# Altium PCB PCB4.PcbDoc
Units mm, origin at the board's own origin, x right, y up, seen from the top; angles counter-clockwise.
Board outline 55.24 x 17.53 mm, 2 copper layers (Top Layer, Bottom Layer); 36 components, 31 nets, 162 pads, 27 vias.
Unrouted connection lines stored in the file: 1.
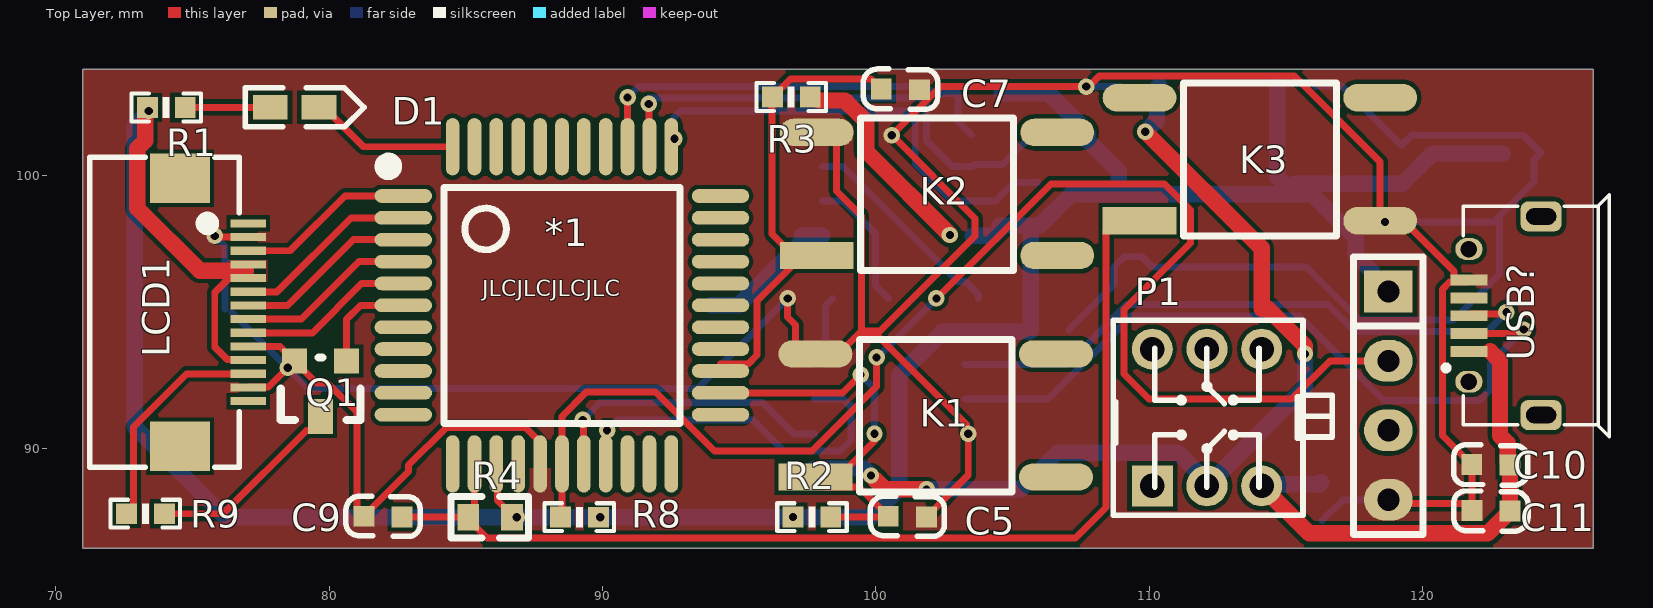
[diagram p0: Top Layer view]
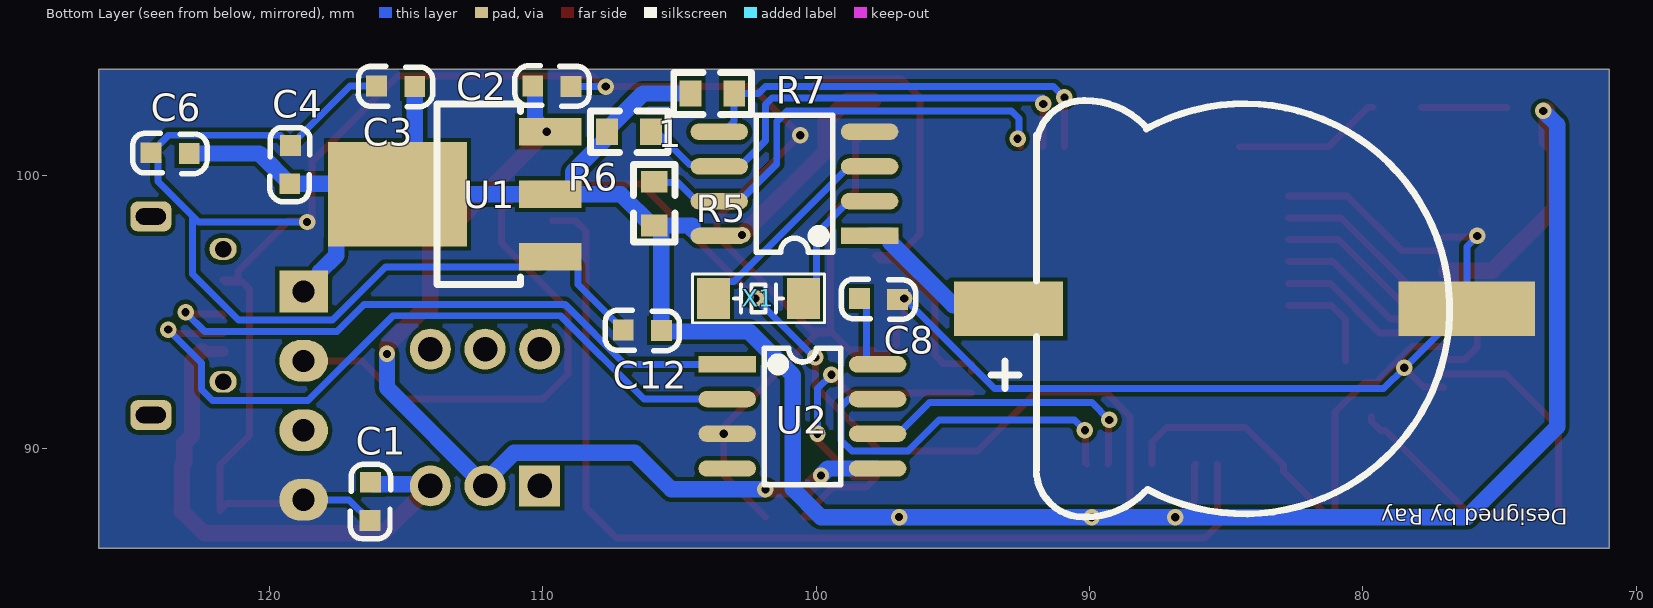
[diagram p1: Bottom Layer view, seen from below]
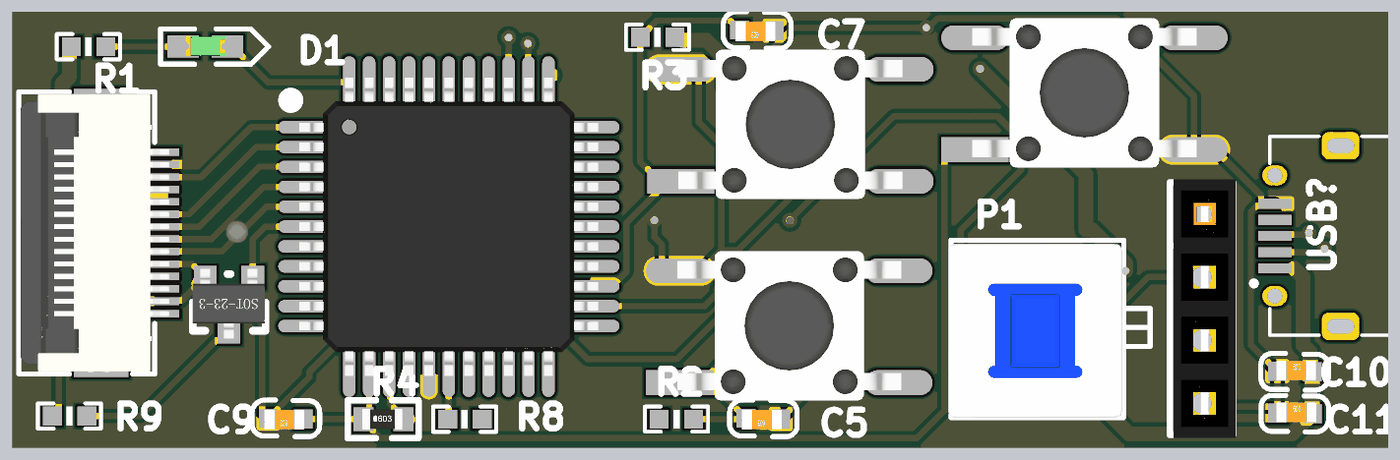
[diagram p2: 3D render of the assembled board from above, using the file's embedded part models]
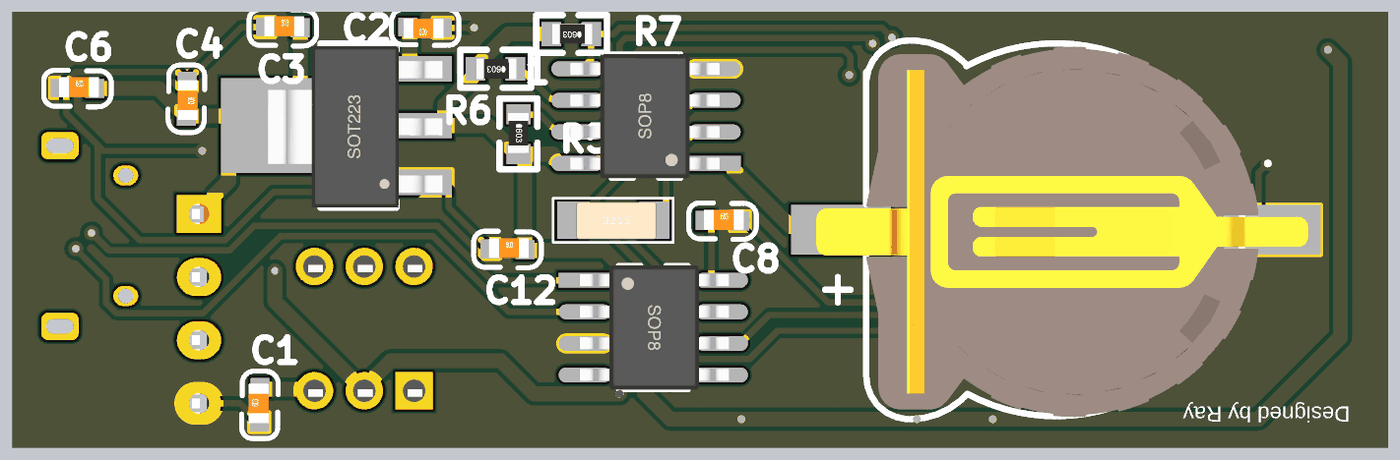
[diagram p3: 3D render of the assembled board from below, using the file's embedded part models]

## Layer stack, top to bottom
Top Solder: solder mask 0.0102, Solder Resist, Dk 3.5
Top Layer: signal copper 0.0356
Dielectric 1: dielectric 0.32, FR-4, Dk 4.8
Bottom Layer: signal copper 0.0356
Bottom Solder: solder mask 0.0102, Solder Resist, Dk 3.5

## Board outline
70.993,86.36 70.993,103.886 126.238,103.886 126.238,86.36

## Design rules (kind name [scope] priority, off if disabled: settings)
Clearance [All] p1: gap=0.16 ignorepadtopadclearanceinfootprint=FALSE
PlaneConnect [All] p1: planeconnectstyle=Direct reliefexpansion=0.508 reliefentries=4 reliefconductorwidth=0.254 reliefairgap=0.254
PolygonConnect [All] p1: connectstyle=Direct reliefconductorwidth=0.254 reliefentries=4 polygonreliefangle="90 Angle" airgapwidth=0.254
RoutingVias [All] p1: holewidth=0.711 width=1.27 viastyle="Through Hole" minholewidth=0.711 minwidth=1.27 maxholewidth=0.711 maxwidth=1.27
SolderMaskExpansion [All] p1: expansion=0.102
Width [All] p1: maxlimit=0.6 minlimit=0.254 preferedwidth=0.254
29 further rules are at their usual default settings.

## Classes and differential pairs
component class Sheet1: 1 *1 C1 C2 C3 C4 C5 C6 C7 C8 C9 C10 C11 C12 D1 K2 K3 P1 Q1 R1 R2 R3 R4 R5 R6 R7 R8 R9 U1 USB? X1

## Components (designator, comment, footprint, x,y, rotation, side; value= is the part's Value field where it differs from the comment)
1 "DS1302ZN" SOP8 98.044,97.79 r0 bottom
*1 "STC8F2K60S4" LQFP44 88.646,95.25 r0 top
C1 "10uF" 0603C 116.332,87.376 r90 bottom
C2 "10uF" 0603C 108.961,103.242 r0 bottom
C3 "10uF" 0603C 116.083,103.285 r180 bottom
C4 "10uF" 0603C 119.219,101.097 r270 bottom
C5 "0.1uF" 0603C 101.854,87.503 r180 top
C6 "0.1uF" 0603C 124.333,100.838 r180 bottom
C7 "0.1uF" 0603C 101.6,103.124 r180 top
C8 "0.1uF" 0603C 98.425,95.504 r180 bottom
C9 "0.1uF" 0603C 82.677,87.503 r180 top
C10 "0.1uF" 0603C 121.788,89.442 r0 top
C11 "0.1uF" 0603C 121.793,87.757 r0 top
C12 "0.1uF" 0603C 107.061,94.361 r180 bottom
D1 "LED" LED-0603B 77.851,102.489 r0 top
K1 "KEY_M" SMD-6X6X5 97.872,89.052 r90 top
K2 "KEY_M" SMD-6X6X5 97.917,97.155 r90 top
K3 "KEY" SMD-6X6X5 109.728,98.425 r90 top
LCD1 "1.8寸SPI屏" FPC0.5-14P 74.549,94.996 r270 top
P1 "Header 3X2" "KFT DIP-7X7" 110.109,88.646 r90 top
Q1 "NPN" SOT-23 79.756,92.329 r180 top
R1 "1K" 0603P 74.041,102.489 r0 top
R2 "10K" 0603P 97.663,87.503 r180 top
R3 "10K" 0603P 96.901,102.87 r0 top
R4 "10K" 0603R 85.09,87.503 r0 top
R5 "10K" 0603R 105.918,99.771 r270 bottom
R6 "10K" 0603R 106.045,101.6 r0 bottom
R7 "10K" 0603R 102.997,102.997 r0 bottom
R8 "10K" 0603P 89.154,87.503 r0 top
R9 "10R" 0603P 73.279,87.63 r0 top
U1 "AMS1117" SOT223 109.728,99.314 r90 bottom
U2 "CH330N" sop8 103.251,93.091 r180 bottom
U3 "DHT11" Fe-HDR1X4/2.54-S 118.745,95.758 r0 top
USB? "USB-AB" USB_AB 124.333,94.869 r270 top
X1 "XTAL-2P" "OSC 3215-2P" 102.108,95.504 r180 bottom
? "Comment" CR1220-A1 92.964,95.123 r0 bottom

## Footprints (in the part's own frame and the unit in brackets; to place one, negate y for a bottom-side part, rotate by r counter-clockwise, add the part's x,y. Pads: shape width x height; smd on the part's side, far side on the other; paste and mask are expansions set on the pad)
0603C [mil]
  rect 30x30 smd: 1(0.21,-0.35) 2(55.21,-1.35)
  silkscreen extent -26,-30 81,28, body extent -1,-15 62,16, height 12
0603P [mil]
  rect 30x30 smd: 1(-27,0) 2(27.5,-0.06)
  silkscreen extent -50,-20 50,20
0603R [mm]
  rect 0.8x0.965 smd: 1(0,0) 2(1.6,0)
  silkscreen extent -0.64,-0.76 2.21,0.76, body extent -0.04,-0.41 1.56,0.41, height 0.45
CR1220-A1 [mm]
  rect 4x2 smd: 1(0,0)
  rect 5x2 smd: 2(-16.764,0)
  silkscreen extent -16.13,-7.62 0.64,7.62, body extent -18.77,-7.37 0.99,7.53, height 4.05
Fe-HDR1X4/2.54-S [mil]
  rect 70x60 hole 32: 1(0,0)
  oval 70x60 hole 32: 2(0,-100) 3(0,-200) 4(0,-300)
  silkscreen extent -50,-350 50,50, body extent -44,-355 54,55, height 335
FPC0.5-14P [mm]
  rect 1.8x2.2 smd: 0(-4.9,0) 0(4.9,0)
  rect 0.3x1.3 smd: 1(-3.25,2.497) 2(-2.75,2.497) 3(-2.25,2.497) 4(-1.75,2.497) 5(-1.25,2.497) 6(-0.75,2.497) 7(-0.25,2.497) 8(0.25,2.497) 9(0.75,2.497) 10(1.25,2.497) 11(1.75,2.497) 12(2.25,2.497) 13(2.75,2.497) 14(3.25,2.497)
  silkscreen extent -5.68,-3.3 5.68,2.16, body extent -5.6,-3.23 5.6,2.77, height 2
"KFT DIP-7X7" [mm]
  rect 1.5x1.5 hole 0.9: 1(0,0)
  round 1.5 hole 0.9: 2(0,-2) 3(0,-4) 4(5,-4) 5(5,-2) 6(5,0)
  silkscreen extent -1.08,-6.58 6.06,1.42, body extent -1.09,-5.46 5.91,1.54, height 11.2
LED-0603B [mil]
  rect 50x35 smd: A(0,0.26) K(70,0.26)
  silkscreen extent -36,-28 135,28, body extent 4,-15 66,17, height 24
LQFP44 [mm]
  oval 2.1x0.5 smd: 1(-5.927,4) 2(-5.927,3.2) 3(-5.927,2.4) 4(-5.927,1.6) 5(-5.927,0.8) 6(-5.927,0) 7(-5.927,-0.8) 8(-5.927,-1.6) 9(-5.927,-2.4) 10(-5.927,-3.2) 11(-5.927,-4) 23(5.673,-4) 24(5.673,-3.2) 25(5.673,-2.4) 26(5.673,-1.6) 27(5.673,-0.8) 28(5.673,0) 29(5.673,0.8) 30(5.673,1.6) 31(5.673,2.4) 32(5.673,3.2) 33(5.673,4)
  oval 0.5x2.1 smd: 12(-4.127,-5.8) 13(-3.327,-5.8) 14(-2.527,-5.8) 15(-1.727,-5.8) 16(-0.927,-5.8) 17(-0.127,-5.8) 18(0.673,-5.8) 19(1.473,-5.8) 20(2.273,-5.8) 21(3.073,-5.8) 22(3.873,-5.8) 34(3.873,5.8) 35(3.073,5.8) 36(2.273,5.8) 37(1.473,5.8) 38(0.673,5.8) 39(-0.127,5.8) 40(-0.927,5.8) 41(-1.727,5.8) 42(-2.527,5.8) 43(-3.327,5.8) 44(-4.127,5.8)
  silkscreen extent -6.73,-4.32 4.19,5.33, body extent -6.13,-6 5.87,6, height 1.5
"OSC 3215-2P" [mm]
  rect 1.2x1.5 smd: 1(-1.65,0) 2(1.65,0)
  silkscreen extent -2.41,-0.89 2.41,0.89, body extent -1.47,-0.76 1.73,0.74, height 0.61
SMD-6X6X5 [mm]
  rect 1x2.7 smd: 1(-0.08,0.082)
  oval 1x2.7 smd: 2(4.42,0.082) 3(-0.08,-8.718) 4(4.42,-8.718)
  silkscreen extent -0.63,-7.11 4.95,-1.52, body extent -0.79,-8.82 5.21,0.18, height 4.95
SOP8 [mm]
  rect 2.1x0.6 smd: 1(0,0)
  oval 2.1x0.6 smd: 2(0,-1.27) 3(0,-2.54) 4(0,-3.81) 5(5.5,-3.81) 6(5.5,-2.54) 7(5.5,-1.27) 8(5.5,0)
  silkscreen extent 1.35,-4.41 4.15,0.6, body extent -0.21,-4.4 5.8,0.6, height 1.9
sop8 [mm]
  rect 2.1x0.6 smd: 1(0,0)
  oval 2.1x0.6 smd: 2(0,-1.27) 3(0,-2.54) 4(0,-3.81) 5(5.5,-3.81) 6(5.5,-2.54) 7(5.5,-1.27) 8(5.5,0)
  silkscreen extent 1.35,-4.41 4.15,0.6, body extent -0.21,-4.4 5.8,0.6, height 1.9
SOT223 [mil]
  rect 40x90 smd: 1(-90,0) 2(0,0) 3(90,0)
  rect 150x200 smd: 2(0,220)
  silkscreen extent -130,43 130,163, body extent -130,-30 126,246, height 65
SOT-23 [mil]
  rect 36x36 smd: B(-35,-35) E(40,-35)
  rect 36x50 smd: C(3,45)
  silkscreen extent -55,-40 60,50, body extent -54,-48 60,62, height 47
USB_AB [mm]
  rect 0.4x1.35 smd: 1(1.3,-2.642) 2(0.65,-2.642) 3(0,-2.642) 4(-0.65,-2.642) 5(-1.3,-2.642)
  oval 0.8x1 hole 0.6: 6(-2.438,-2.642) 9(2.413,-2.642)
  rrect50% 1.1x1.5 hole 0.6 slot 1.1 at 90 deg: 7(-3.632,0) 8(3.632,0)
  silkscreen extent -4.42,-3.58 4.42,2.49

## Part data
C1 C2 C3 C4 C6 C9 C12: library part CAP, "无极性电容"
C5 C7 C8 C10 C11: library part Cap, "Capacitor", LatestRevisionDate=17-Jul-2002, LatestRevisionNote="Re-released for DXP Platform.", PackageDescription="Radial Cap, Thru-Hole; 2 Leads; 0.3 in Pin Spacing", PackageReference=RAD-0.3, Published=8-Jun-2000, Publisher="Altium Limited"
P1: "Header, 3-Pin, Dual row", LatestRevisionDate=17-Jul-2002, LatestRevisionNote="Re-released for DXP Platform.", Publisher="Altium Limited"
Q1: "NPN三极管"
R1 R2 R3 R9: library part Res2, "Resistor", LatestRevisionDate=17-Jul-2002, LatestRevisionNote="Re-released for DXP Platform.", PackageDescription="Axial Device, Thru-Hole; 2 Leads; 0.4 in Pin Spacing", PackageReference=AXIAL-0.4, Published=8-Jun-2000, Publisher="Altium Limited"
R4 R5 R6 R7: library part RES
R8: library part R
U1: "三端稳压芯片"
U3: "数字温湿度传感器"
USB?: "MicroUSB"
X1: "2脚无源脚晶振"

## Via types
v1: diameter 0.6, hole 0.3, Top Layer to Bottom Layer, tented both sides, 27 vias

## Nets (pads, with @x,y where several pads share a name; then routed paths per layer and width w, separated by ;. In a path a pad name is that pad's centre, name@x,y a point inside that pad or via, vN(x,y) a via of type N, cw(c..) or ccw(c..) an arc to the next point about the centre after c; other vN are vias at no path point)
5V: C1.2 C2.2 C10.2 C11.2 P1.2 P1.3 U1.3 U2.5 USB?.1 | length 53.8
  Top Layer w0.4: USB?.1 122.475,93.569
  Top Layer w0.6: v1@99.949,88.9 100.33,88.519 v1(101.854,88.519) ; v1(109.855,101.6) 114.109,97.346 114.109,95.123 114.343,95.123 115.697,93.769 v1(115.697,93.472) ; P1.3 115.848,86.907 122.38,86.907 C11.2 123.193,87.725 123.193,89.405 C10.2 123.109,89.489 123.109,90.199 122.826,90.481 122.826,93.218 122.475,93.569
  Bottom Layer w0.6: U2.5 99.568,89.281 v1(99.822,89.027) ; v1(101.854,88.519) 105.296,88.519 106.633,89.856 111.05,89.856 112.109,88.797 P1.2 115.697,92.234 v1(115.697,93.472) ; v1(109.855,101.6) 110.282,102.027 110.282,103.195 C2.2 ; P1.3 114.175,88.712 116.231,88.712 C1.2
BG_CTRL: *1.6 Q1.B | length 3.8
  Top Layer w0.254: Q1.B 80.645,94.742 81.153,95.25 *1.6
CLK_RST: 1.5 *1.36 R7.1 | length 15.9
  Top Layer w0.254: *1.36@90.926,101.056 *1.36 v1(90.919,102.857) v1@90.932,102.87
  Bottom Layer w0.254: v1@90.932,102.87 91.313,103.251 101.854,103.251 102.108,102.997 R7.1 102.997,101.981 1.5@103.505,101.473
DATA: *1.17 R8.1 U3.2 | length 50.8
  Top Layer w0.254: R8.1 88.519,87.554 *1.17 88.519,91.186 89.408,92.075 91.935,92.075 94.094,89.916 97.663,89.916 100.028,92.281 v1(100.028,93.345) ; v1(102.214,95.504) 106.405,99.695 110.551,99.695 111.506,98.74 111.506,97.536 109.072,95.102 109.072,92.731 109.982,91.821 115.208,91.821 116.605,93.218 U3.2
  Bottom Layer w0.254: v1(100.028,93.345) 100.055,93.345 v1(102.214,95.504) v1@102.362,95.504
GND: 1.4 *1.16 ?.2 C1.1 C2.1 C3.1 C4.1 C5.1 C6.1 C7.1 C8.2 C9.2 C10.1 C11.1 C12.1 K1.2 K2.2 K3.3 LCD1.2 LCD1.10 LCD1.13 Q1.E U1.1 U2.3 U3.4 USB?.5 | length 161.8
  Top Layer w0.254: v1(75.819,97.79) 75.863,97.746 LCD1.2 ; LCD1.13 77.069,92.269 77.791,92.269 v1(78.486,92.964) Q1.E ; LCD1.10 78.212,93.746 Q1.E ; *1.16 87.719,90.25 87.182,90.787 84.297,90.787 82.913,89.403 82.913,89.175 C9.2 81.021,87.791 81.021,91.343 79.95,92.414 79.544,92.414 Q1.E ; v1(96.774,95.504) 96.774,94.823 97.067,94.53 97.067,93.817 97.412,93.472 K1.2 ; K2.2 98.213,101.575 98.558,101.23 98.558,99.435 99.472,98.521 99.472,94.304 ; C5.1 103.378,89.041 v1(103.378,90.551) 103.312,90.617 103.312,90.891 99.969,94.234 99.542,94.234 99.472,94.304 ; U3.4 118.881,88.002 121.544,88.002 C11.1 121.798,89.428 C10.1 120.729,90.497 120.729,95.838 120.988,96.096 121.618,96.096 USB?.5 121.216,96.169 121.143,96.242 121.143,96.497 119.296,98.345 K3.3 118.446,100.502 115.316,103.632 108.17,103.632 107.79,103.251 v1(107.696,103.251) 102.362,103.251 v1(100.584,101.473) 103.632,98.425 103.632,97.79 100.146,94.304 99.472,94.304 ; K1.2 97.933,93.615 K1.2@98.783,93.615 ; K1.2 98.64,93.472 K1.2@98.783,93.615 ; K1.2@98.783,93.615 99.472,94.304
  Bottom Layer w0.254: v1(75.819,97.79) 76.2,97.409 ?.2 ; ?.2@76.454,94.996 v1(78.486,92.964) 79.248,92.202 93.472,92.202 v1(96.774,95.504) ; C12.1 107.31,94.606 107.31,94.61 108.712,96.012 108.712,96.647 109.093,97.028 U1.1 110.109,96.647 115.754,96.647 117.692,94.709 121.125,94.709 122.809,96.393 122.809,98.522 ; v1(107.696,103.251) C2.1 ; C3.1 117.043,103.276 C4.1 119.607,101.472 123.685,101.472 C6.1 124.074,100.575 124.074,99.787 122.809,98.522 ; C1.1 117.08,88.138 U3.4 ; v1(118.618,98.298) 122.585,98.298 122.809,98.522
IN0: P1.5
IN1: P1.6
IO: 1.6 *1.35 R6.1 | length 18.4
  Top Layer w0.254: v1(91.694,102.616) 91.707,102.603 91.707,101.062 *1.35
  Bottom Layer w0.254: v1(91.694,102.616) 91.694,102.837 101.611,102.837 101.854,102.594 101.854,101.27 102.794,100.33 1.6 103.61,100.396 104.632,100.396 105.836,101.6 R6.1@105.918,101.6
KEY2: *1.24 C5.2 K1.1 R2.1 | length 16.1
  Top Layer w0.254: *1.24 98.781,92.05 v1(99.441,92.71) ; R2.1 100.417,87.503 C5.2 99.39,88.599 98.163,88.599 K1.1 98.64,88.972 99.949,90.281 v1(99.949,90.551)
  Bottom Layer w0.254: v1(99.441,92.71) 99.949,92.202 v1(99.949,90.551)
KEY3: *1.25 C7.2 K2.1 R3.1 | length 18
  Top Layer w0.254: *1.25 94.319,93.113 95.341,93.113 95.656,93.428 95.656,94.228 95.656,94.234 95.656,95.402 97.157,96.903 97.663,96.903 K2.1 96.985,97.075 96.198,97.862 R3.1@96.198,102.87 ; R3.1 96.882,103.536 99.82,103.536 C7.2
LCD_CS: *1.1 LCD1.3 | length 6.5
  Top Layer w0.254: LCD1.3 78.577,97.246 80.581,99.25 *1.1
LCD_DCX: *1.4 LCD1.8 | length 6.5
  Top Layer w0.254: LCD1.8 78.998,94.746 81.102,96.85 *1.4
LCD_RST: *1.5 LCD1.9 | length 6.4
  Top Layer w0.254: LCD1.9 79.387,94.246 81.191,96.05 *1.5
LCD_SCL: *1.2 LCD1.6 | length 6.8
  Top Layer w0.254: LCD1.6 78.093,95.746 80.797,98.45 *1.2
LCD_SDA: *1.3 LCD1.7 | length 6.7
  Top Layer w0.254: LCD1.7 78.482,95.246 80.899,97.663 82.706,97.663 *1.3
Net1_1: 1.1 ?.1 | length 5.2
  Bottom Layer w0.6: ?.1@93.98,95.25 94.98,95.25 97.294,97.564 97.294,97.79 1.1
Net1_2: 1.2 X1.2 | length 5
  Bottom Layer w0.254: 1.2 98.794,99.06 99.985,97.869 99.985,95.977 X1.2
Net1_3: 1.3 X1.1 | length 7.8
  Bottom Layer w0.254: 1.3 98.794,100.33 102.997,96.127 103.285,96.127 103.758,95.654 X1.1
Net*1_44: *1.44 D1.K | length 5.5
  Top Layer w0.254: D1.K 79.82,102.496 81.265,101.05 *1.44
NetC8_1: C8.1 U2.8 | length 2.8
  Bottom Layer w0.254: U2.8 98.006,93.091 98.166,93.251 98.166,95.241 C8.1
NetD1_A: D1.A R1.2 | length 3.1
  Top Layer w0.254: R1.2 77.843,102.487 D1.A
NetLCD1_12: LCD1.12 R9.1 | length 8.3
  Top Layer w0.254: R9.1 72.847,87.884 72.847,90.8 74.793,92.746 LCD1.12
NetQ1_C: Q1.C R9.2 | length 7.3
  Top Layer w0.254: R9.2 76.122,87.628 79.172,90.678 79.35,90.678 79.68,91.008 Q1.C
NetU2_1: U2.1 USB?.3 | length 22.8
  Top Layer w0.254: USB?.3 121.755,94.932 122.999,94.932 v1(123.063,94.996)
  Bottom Layer w0.254: U2.1 106.984,93.091 109.176,95.283 116.532,95.283 117.52,94.295 122.362,94.295 v1(123.063,94.996)
NetU2_2: U2.2 USB?.2 | length 26.7
  Top Layer w0.254: USB?.2 123.462,94.219 123.604,94.361 v1(123.698,94.361)
  Bottom Layer w0.254: U2.2 106.299,91.821 109.347,94.869 115.483,94.869 118.583,91.769 122.076,91.769 122.478,92.171 122.478,93.141 v1(123.698,94.361)
RST: *1.13 C9.1 K3.1 R4.1 | length 40.3
  Top Layer w0.254: C9.1 84.999,87.512 85.28,87.231 85.777,86.734 107.308,86.734 108.423,87.849 108.423,97.972 108.796,98.345 K3.1 ; *1.13 85.319,87.27 R4.1@85.349,87.24
SCLK: 1.7 *1.34 R5.1 | length 17.1
  Top Layer w0.254: *1.34 92.519,101.232 v1(92.633,101.346)
  Bottom Layer w0.254: v1@92.583,101.346 92.583,102.086 92.859,102.362 101.059,102.362 101.44,101.981 101.44,100.414 102.794,99.06 1.7 104.372,99.06 105.055,99.743 105.918,99.743 R5.1
USART2_RX: *1.18 U2.6 | length 10.8
  Top Layer w0.254: v1(89.281,91.059) 89.3,91.04 89.3,89.469 *1.18
  Bottom Layer w0.254: v1(89.281,91.059) 89.916,91.694 95.858,91.694 97.001,90.551 U2.6
USART2_TX: *1.19 U2.7 | length 13.7
  Top Layer w0.254: *1.19 90.145,89.475 90.145,90.653 v1(90.17,90.678)
  Bottom Layer w0.254: v1(90.17,90.678) 90.551,91.059 95.504,91.059 96.647,89.916 98.696,89.916 99.088,90.308 99.088,91.595 99.06,91.567 98.806,91.821 U2.7
V3.3: 
VCC: 1.8 *1.14 C3.2 C4.2 C6.2 C12.2 LCD1.4 LCD1.5 LCD1.11 R1.1 R2.2 R3.2 R4.2 R5.2 R6.2 R7.2 R8.2 U1.2 U3.1 | length 114
  Top Layer w0.254: LCD1.5@76.962,96.223 76.317,96.223 75.819,95.725 75.819,93.726 76.276,93.269 77.023,93.269 LCD1.11 ; *1.14 86.166,89.403 86.166,88.109 R4.2@86.69,87.585
  Top Layer w0.6: R1.1@73.274,102.408 73.274,101.272 72.989,100.987 72.989,98.805 75.274,96.52 76.962,96.52 ; R3.2@97.917,102.743 98.868,102.743 99.076,102.535 99.083,102.535 99.645,101.972 99.645,100.888 v1(102.709,97.824)
  Bottom Layer w0.6: v1(73.406,102.362) 72.898,101.854 72.898,90.805 76.2,87.503 v1(86.868,87.503) v1(89.916,87.503) 99.822,87.503 100.86,88.541 100.86,92.7 102.453,94.294 105.626,94.294 C12.2 R5.2@105.659,97.912 ; 1.8 104.294,97.79 104.536,98.032 104.536,98.171 R5.2 106,98.171 107.143,99.314 U1.2@109.093,99.314 ; R7.2 106.33,102.997 107.645,101.682 R6.2 107.745,101.5 107.745,101.281 108.885,100.141 108.885,99.522 U1.2@109.093,99.314 ; C3.2 114.681,99.949 U1.2@114.998,99.632 ; U1.2@115.316,99.695 C4.2 120.362,100.804 C6.2 ; U3.1 118.618,95.758 118.156,96.22 118.156,96.474 117.556,97.074 117.556,97.709 115.951,99.314 115.316,99.314 109.728,99.314 U1.2@109.093,99.314
  other v1: 96.965,87.505
pads on no net: *1.7 *1.8 *1.9 *1.10 *1.11 *1.12 *1.15 *1.20 *1.21 *1.22 *1.23 *1.26 *1.27 *1.28 *1.29 *1.30 *1.31 *1.32 *1.33 *1.37 *1.38 *1.39 *1.40 *1.41 *1.42 *1.43 K1.3 K1.4 K2.3 K2.4 K3.2 K3.4 LCD1.0 LCD1.1 LCD1.14 P1.1 P1.4 U2.4 U3.3 USB?.4 USB?.6 USB?.7 USB?.8 USB?.9

## Polygon pours and split planes (outlines as drawn)
GND on Top Layer (solid, pour order 12): 70.993,103.886 70.993,86.36 126.238,86.36 126.238,103.886
VCC on Top Layer "Top Layer-VCC" (solid, pour order 4): 76.327,96.901 77.724,96.901 77.724,96.139 76.327,96.139
no net on Top Layer "Top Layer-No Net" (solid, pour order 0): 76.327,96.901
GND on Bottom Layer (solid, pour order 10): 70.993,103.886 70.993,86.36 126.238,86.36 126.238,103.886

## Silkscreen, mask and mechanical layers (free items; w line width, h text height)
Top Overlay:
  text "JLCJLCJLCJLC" at 85.598,95.377 h1
Bottom Overlay:
  text "Designed by Ray" at 72.517,88.011 h1 r180
Mechanical 1:
  lines w0.254: 70.993,86.36 126.238,86.36 126.238,88.011 126.238,103.886 70.993,103.886 70.993,86.36